# EAGLE board pcb (EAGLE 9.7.0)
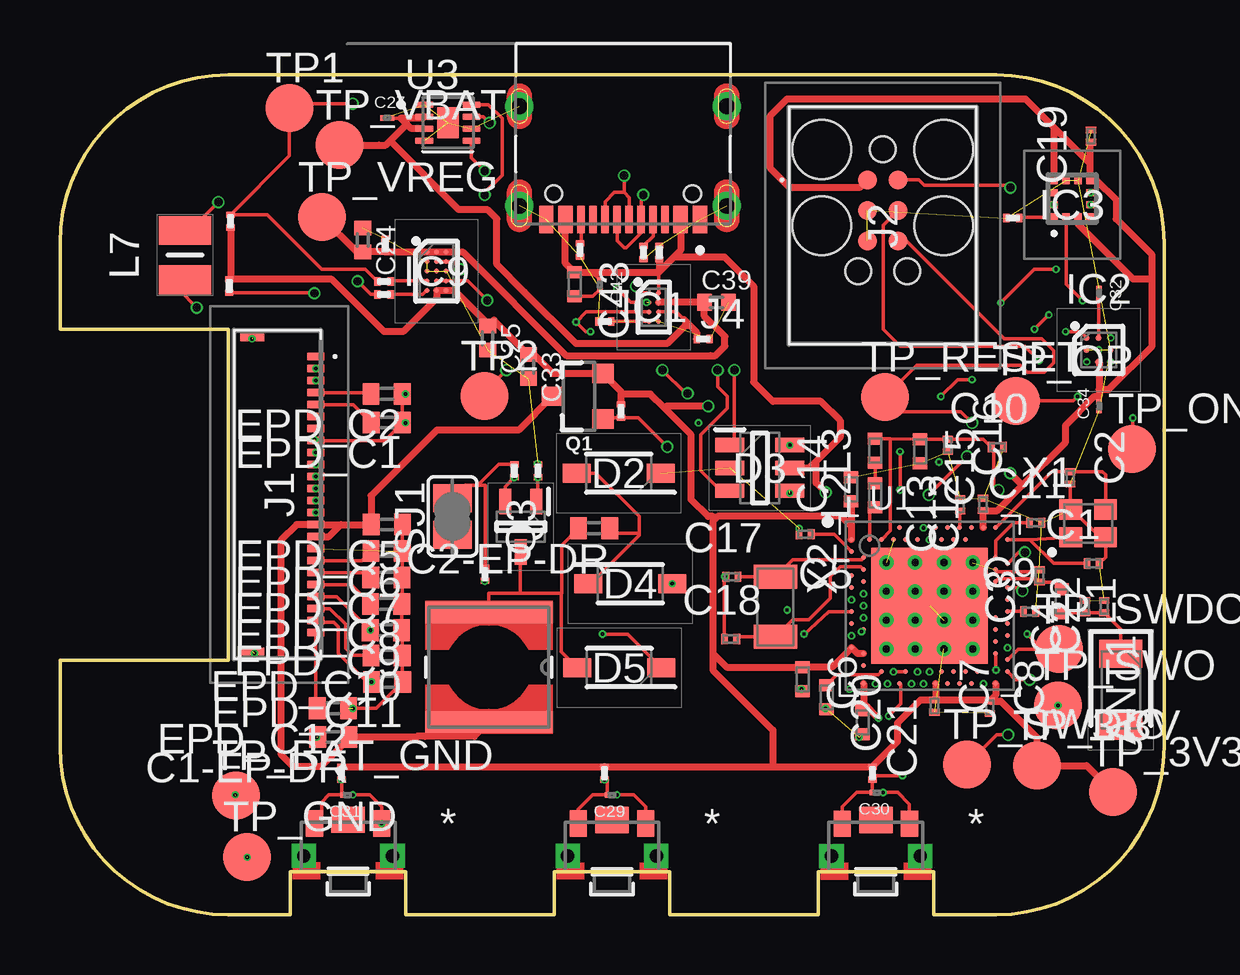
[diagram p0: board, top side]
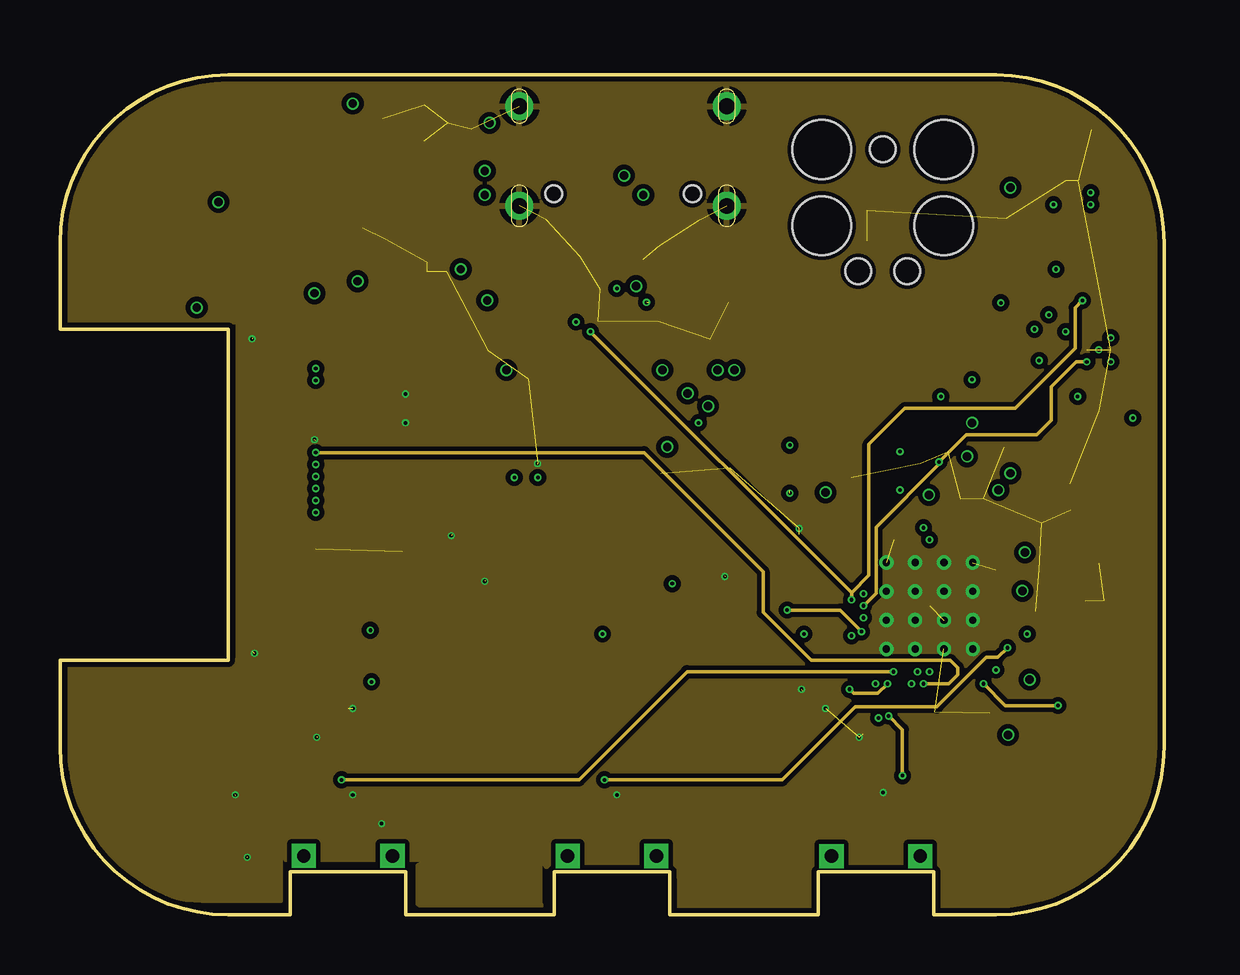
[diagram p1: board, inner layer Route2]
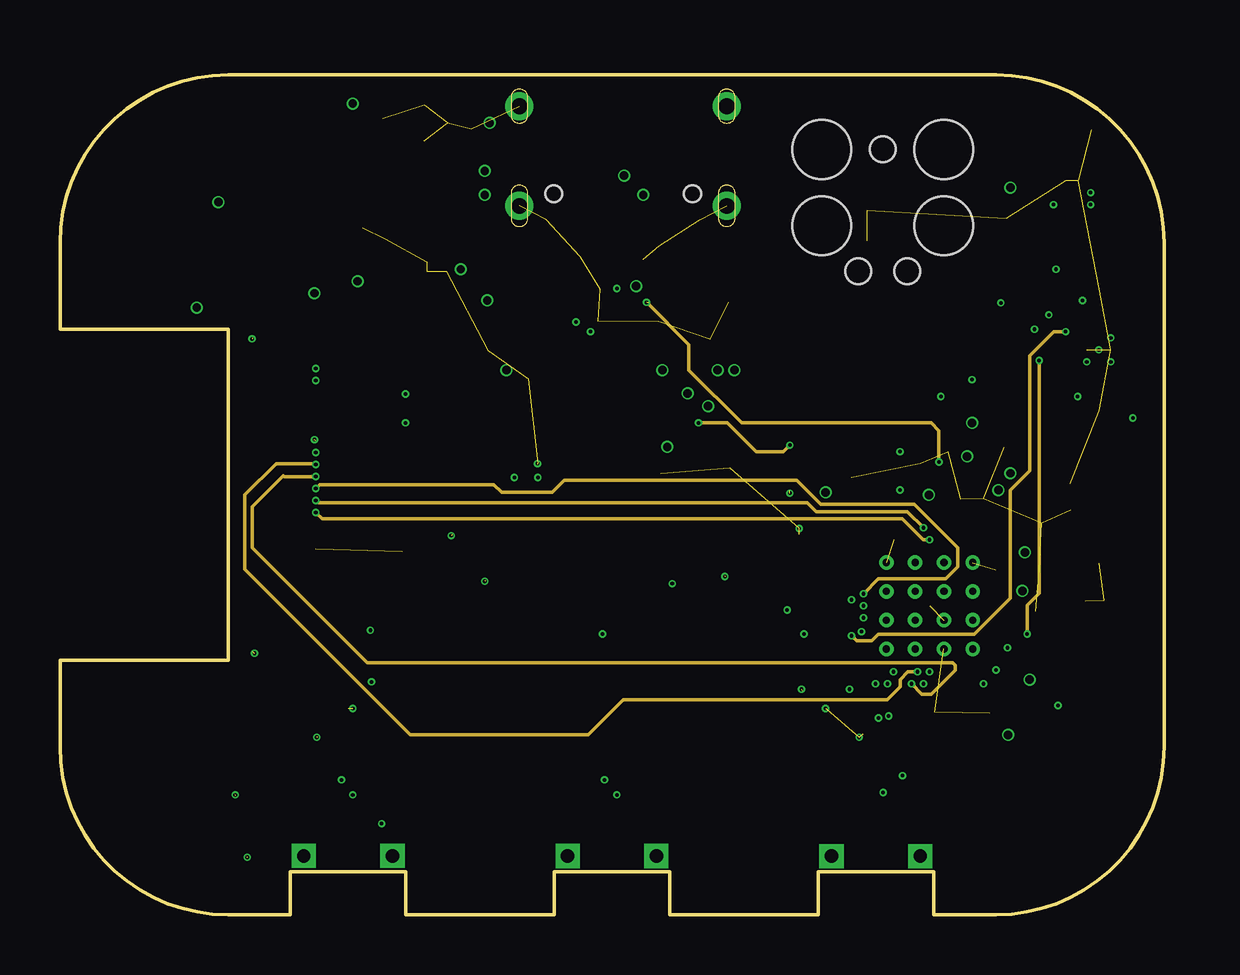
[diagram p2: board, inner layer Route15]
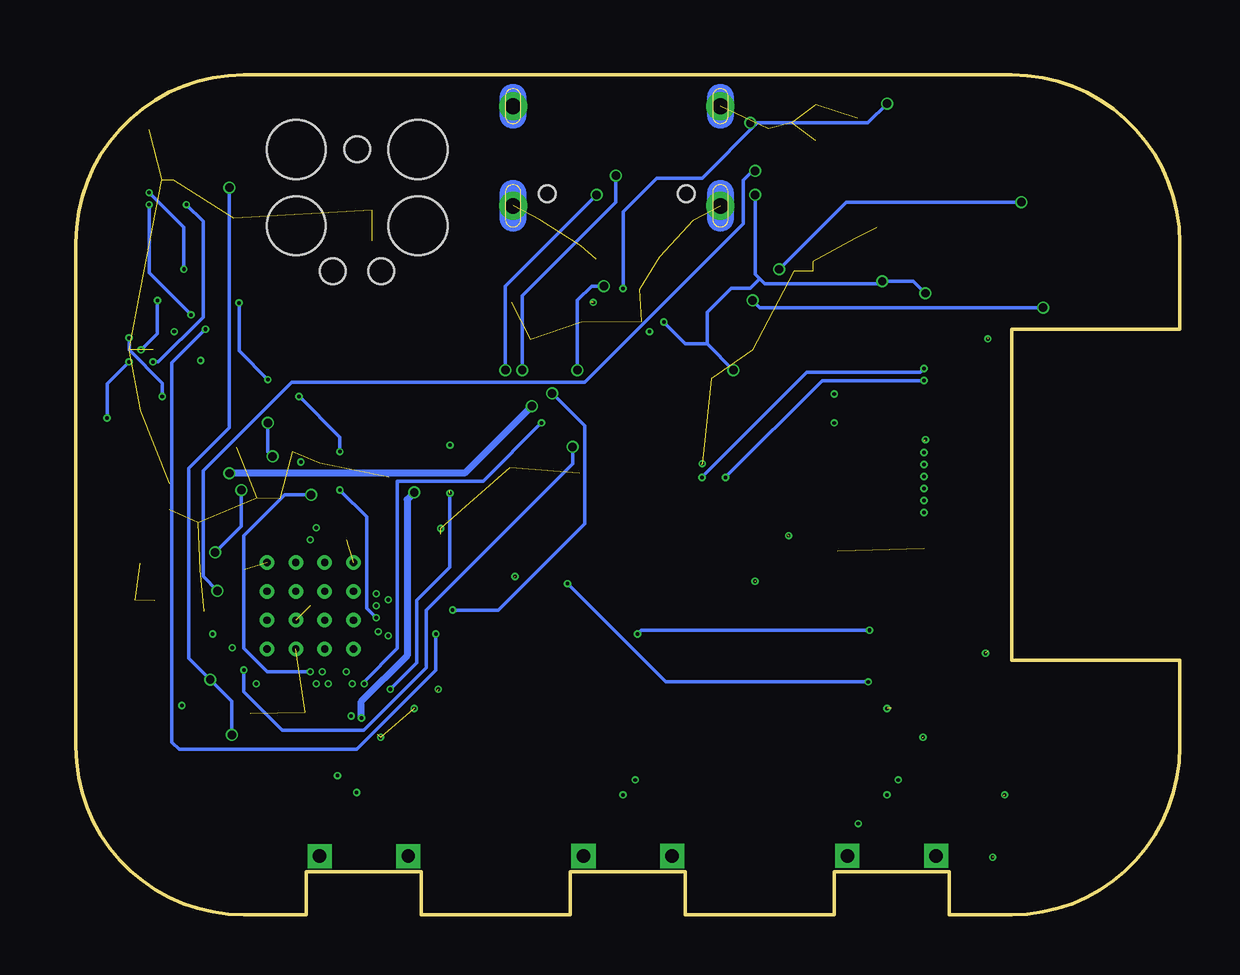
[diagram p3: board, bottom side, seen from below]

Size 46 x 35 mm. Coordinates in mm from the lower left corner, seen from the top.
Outline: 0,10.6 0,7 arc90 7,0 9.6,0 9.6,1.8 14.4,1.8 14.4,0 20.6,0 20.6,1.8 25.4,1.8 25.4,0 31.6,0 31.6,1.8 36.4,1.8 36.4,0 39,0 arc90 46,7 46,28 arc90 39,35 7,35 arc90 0,28 0,24.4 7,24.4 7,10.6 0,10.6
Copper layers (1+2*15+16): Top 0.035mm / dielectric 1.6mm / Route2 0.035mm / dielectric 0.15mm / Route15 0.035mm / dielectric 0.2mm / Bottom 0.035mm
Design rules "jlcpcb-2layers.dru *": minimum track width 0.075mm, minimum drill 0.15mm, track to track 5mil, track to pad 5mil, pad to pad 5mil, via to via 5mil, smd to smd 5mil, copper to edge 0.2mm, drill to drill 6mil, minimum pad ring 0.075mm, minimum via ring 0.075mm, stop-mask expansion 4mil, vias tented up to drill 0mil, thermal gap 10mil

## Footprints (pad centres in the part's own frame; a part is rotated, then mirrored left to right if it is on the bottom)
2450AT18B100E_ANTC3216X140N = smd 1.15 x 1.8: 1 -1.5,0; 2 1.5,0
NORDIC_NRF_3_RESC0201_L = smd 0.28 x 0.43: 1 -0.255,0; 2 0.255,0
ESP32_C6_LIBRARY_1_ESP32_WROVER_EAGLE-LTSPICE_C0402 = smd 0.7 x 0.9: 1 -0.65,0; 2 0.65,0
NORDIC_NRF_3_RESC0402_L = smd 0.5 x 0.6: 1 -0.5,0; 2 0.5,0
GRM011R60J152KE01L_1_0201 = smd 0.35 x 0.25: 1 0,0.275; 2 0,-0.275
PERFECT_0402_0402 = smd 0.6 x 0.7: 1 -0.5,0; 2 0.5,0
GRM011R60J152KE01L_2_CAPC0201X13N = smd 0.22 x 0.23: 1 -0.185,0; 2 0.185,0
ESP32_C6_LIBRARY_5_SOD3716X135N = smd 1.15 x 0.8: 1 -1.75,0; 2 1.75,0
ESP32_C6_LIBRARY_3_SOT95P280X145-6N = smd 1.2 x 0.6: 1 -1.25,0.95; 2 -1.25,0; 3 -1.25,-0.95; 4 1.25,-0.95; 5 1.25,0; 6 1.25,0.95
BQ25180YBGR_BGA8C40P2X4_100X155X50 = smd 0.2 x 0.2: A1 -0.2,0.6; A2 0.2,0.6; B1 -0.2,0.2; B2 0.2,0.2; C1 -0.2,-0.2; C2 0.2,-0.2; D1 -0.2,-0.6; D2 0.2,-0.6
DRV2605YZFR_BGA9C50P3X3_144X144X62 = smd 0.25 x 0.25: A1 -0.5,0.5; A2 0,0.5; A3 0.5,0.5; B1 -0.5,0; B2 0,0; B3 0.5,0; C1 -0.5,-0.5; C2 0,-0.5; C3 0.5,-0.5
BMA423_BMA423 = smd 0.3 x 0.35: 1 -0.75,-0.775; 2 -0.25,-0.775; 3 0.25,-0.775; 4 0.75,-0.775; 7 0.75,0.775; 8 0.25,0.775; 9 -0.25,0.775; 10 -0.75,0.775 | smd 0.35 x 0.3: 5 0.775,-0.25; 6 0.775,0.25; 11 -0.775,0.25; 12 -0.775,-0.25
RT6160AWSC_BGA15C40P3X5_140X230X60 = smd 0.216 x 0.216: A1 -0.4,0.8; A2 0,0.8; A3 0.4,0.8; B1 -0.4,0.4; B2 0,0.4; B3 0.4,0.4; C1 -0.4,0; C2 0,0; C3 0.4,0; D1 -0.4,-0.4; D2 0,-0.4; D3 0.4,-0.4; E1 -0.4,-0.8; E2 0,-0.8; E3 0.4,-0.8
503480-2400_5034802400 = smd 0.3 x 0.7: 1 -5.75,1.525; 2 -5.25,1.525; 3 -4.75,1.525; 4 -4.25,1.525; 5 -3.75,1.525; 6 -3.25,1.525; 7 -2.75,1.525; 8 -2.25,1.525; 9 -1.75,1.525; 10 -1.25,1.525; 11 -0.75,1.525; 12 -0.25,1.525; 13 0.25,1.525; 14 0.75,1.525; 15 1.25,1.525; 16 1.75,1.525; 17 2.25,1.525; 18 2.75,1.525; 19 3.25,1.525; 20 3.75,1.525; 21 4.25,1.525; 22 4.75,1.525; 23 5.25,1.525; 24 5.75,1.525 | smd 0.3 x 1: MP1 -6.54,-1.125; MP2 6.54,-1.125
TC2030-IDC_TC2030IDC = smd 0.783 x 0.783: 1 -0.953,-0.635; 2 -0.953,0.635; 3 0.317,-0.635; 4 0.317,0.635; 5 1.588,-0.635; 6 1.588,0.635 | hole 2.451: -2.223,-2.54; -2.223,2.54; 0.952,-2.54; 0.952,2.54 | hole 1.067: -2.223,0; 2.857,-1.016; 2.857,1.016
KH-TYPE-C-16P_KINGHELM_KH-TYPE-C-16P = smd 0.6 x 1.15: A1_B12 -3.2,4.725; A4_B9 -2.4,4.725; A9_B4 2.4,4.725; A12_B1 3.2,4.725 | smd 0.3 x 1.15: A5 -1.25,4.725; A6 -0.25,4.725; A7 0.25,4.725; A8 1.25,4.725; B5 1.75,4.725; B6 0.75,4.725; B7 -0.75,4.725; B8 -1.75,4.725 | drill 0.65 pad 1.05: SH1 -4.32,0; SH2 4.32,0; SH3 -4.32,4.15; SH4 4.32,4.15 | hole 0.7: -2.89,3.65; 2.89,3.65
NORDIC_NRF_2_RESC0402_L = smd 0.5 x 0.6: 1 -0.5,0; 2 0.5,0
ESP32_C6_LIBRARY_2_IND_4828-WE-TPC_WRE = smd 0.9 x 5.3: 1 -2.286,0; 2 2.286,0
MLP2016SR47MT0S1_INDC2016X100N = smd 1.2 x 2.2: 1 -1.028,0; 2 1.028,0
ESP32_C6_LIBRARY_4_ESP32_C6_LIBRARY_4_ESP32_C6_LIBRARY_4_ESP32_C6_LIBRARY_4_ESP32_WROVER_SPARKFUN-DISCRETESEMI_SOT23-3 = smd 0.8 x 0.9: 1 -0.95,-1; 2 0.95,-1; 3 0,1.1
ESP32_C6_LIBRARY_6_SOT65P210X110-3N = smd 1.05 x 0.5: 1 -1.05,0.65; 2 -1.05,-0.65; 3 1.05,0
CPF0201D7K68C1_0201 = smd 0.35 x 0.25: 1 0,0.275; 2 0,-0.275
ESP32_C6_LIBRARY_7_JUMPER_SJ = smd 1.168 x 1.6: 1 -0.762,0; 2 0.762,0
2025-10-22_07-23-44_LIBRARY_SW_EVP-AKE31A_PAN = smd 0.711 x 1.092: 1 -1.4,-0.972; 2 1.4,-0.972 | drill 0.559 pad 0.914 square: 3 -1.848,0.381; 4 1.848,0.381 | smd 1.397 x 1.092: 5 0,-1.124
HECTOR_WATCH_1_TP20R = smd 2 x 2: TP 0,0
NORDIC_NRF_4_AQFN50P700X700X85_HS-74N = smd 4.85 x 4.85: P$74 0,0 | drill 0.3 pad 0.6: P$75 -1.8,1.8; P$76 -0.6,1.8; P$77 0.6,1.8; P$78 1.8,1.8; P$79 -1.8,0.6; P$80 -0.6,0.6; P$81 0.6,0.6; P$82 1.8,0.6; P$83 -1.8,-0.6; P$84 -0.6,-0.6; P$85 0.6,-0.6; P$86 1.8,-0.6; P$87 -1.8,-1.8; P$88 -0.6,-1.8; P$89 0.6,-1.8; P$90 1.8,-1.8 | smd 0.2 x 0.2: P$A8 -1.25,3.25; P$A10 -0.75,3.25; P$A12 -0.25,3.25; P$A14 0.25,3.25; P$A16 0.75,3.25; P$A18 1.25,3.25; P$A20 1.75,3.25; P$A22 2.25,3.25; P$A23 2.75,3.25; P$AA24 3.25,-2.25; P$AB2 -2.75,-2.5; P$AC5 -2,-2.75; P$AC9 -1,-2.75; P$AC11 -0.5,-2.75; P$AC13 0,-2.75; P$AC15 0.5,-2.75; P$AC17 1,-2.75; P$AC19 1.5,-2.75; P$AC21 2,-2.75; P$AC24 3.25,-2.75; P$AD2 -2.75,-3.25; P$AD4 -2.25,-3.25; P$AD6 -1.75,-3.25; P$AD8 -1.25,-3.25; P$AD10 -0.75,-3.25; P$AD12 -0.25,-3.25; P$AD14 0.25,-3.25; P$AD16 0.75,-3.25; P$AD18 1.25,-3.25; P$AD20 1.75,-3.25; P$AD22 2.25,-3.25; P$AD23 2.75,-3.25; P$B1 -3.25,2.75; P$B3 -2.5,2.75; P$B5 -2,2.75; P$B7 -1.5,2.75; P$B9 -1,2.75; P$B11 -0.5,2.75; P$B13 0,2.75; P$B15 0.5,2.75; P$B17 1,2.75; P$B19 1.5,2.75; P$B24 3.25,2.75; P$C1 -3.25,2.25; P$D2 -2.75,2; P$D23 2.75,2; P$E24 3.25,1.75; P$F2 -2.75,1.5; P$F23 2.75,1.5; P$G1 -3.25,1.25; P$H2 -2.75,1; P$H23 2.75,1; P$J1 -3.25,0.75; P$J24 3.25,0.75; P$K2 -2.75,0.5; P$L1 -3.25,0.25; P$L24 3.25,0.25; P$M2 -2.75,0; P$N1 -3.25,-0.25; P$N24 3.25,-0.25; P$P2 -2.75,-0.5; P$P23 2.75,-0.5; P$R1 -3.25,-0.75; P$R24 3.25,-0.75; P$T2 -2.75,-1; P$T23 2.75,-1; P$U1 -3.25,-1.25; P$U24 3.25,-1.25; P$V23 2.75,-1.5; P$W1 -3.25,-1.75; P$W24 3.25,-1.75; P$Y2 -2.75,-2; P$Y23 2.75,-2
ESP32_C6_LIBRARY_SON50P200X200X80-9N = smd 0.76 x 0.27: 1 -0.985,0.75; 2 -0.985,0.25; 3 -0.985,-0.25; 4 -0.985,-0.75; 5 0.985,-0.75; 6 0.985,-0.25; 7 0.985,0.25; 8 0.985,0.75 | smd 0.9 x 1.3: 9 0,0
NORDIC_NRF_BT-XTAL_2016_N = smd 0.95 x 0.85: 1 -0.725,-0.575; 2 0.725,-0.575; 3 0.725,0.575; 4 -0.725,0.575
NORDIC_NRF_1_XTAL_3215_N = smd 1 x 1.8: 1 -1.25,0; 2 1.25,0

## Placement (x,y rotation side)
ANT1  2450AT18B100E  [2450AT18B100E_ANTC3216X140N]  44.2,9.38 270 top
C1  12pF  [NORDIC_NRF_3_RESC0201_L]  43.05,14.64 0 top
C1-EP-DR  10uF  [ESP32_C6_LIBRARY_1_ESP32_WROVER_EAGLE-LTSPICE_C0402]  11.39,7.41 180 top
C2  12pF  [NORDIC_NRF_3_RESC0201_L]  42.09,18.21 270 top
C2-EP-DR  4.7uF  [ESP32_C6_LIBRARY_1_ESP32_WROVER_EAGLE-LTSPICE_C0402]  22.25,16.11 180 top
C3  1pF  [NORDIC_NRF_3_RESC0201_L]  40.81,14.12 90 top
C4  1pF  [NORDIC_NRF_3_RESC0201_L]  42.71,12.84 90 top
C5  100nF  [NORDIC_NRF_3_RESC0201_L]  31.05,15.86 180 top
C6  4.7μF  [NORDIC_NRF_3_RESC0402_L]  30.94,9.82 270 top
C7  100nF  [NORDIC_NRF_3_RESC0201_L]  36.44,8.7 270 top
C8  100nF  [NORDIC_NRF_3_RESC0201_L]  38.74,8.65 270 top
C9  820pF  [NORDIC_NRF_3_RESC0201_L]  40.4,12.64 0 top
C10  N.C.  [NORDIC_NRF_3_RESC0201_L]  39.06,19.49 0 top
C11  100pF  [NORDIC_NRF_3_RESC0201_L]  40.65,16.34 0 top
C12  100nF  [NORDIC_NRF_3_RESC0201_L]  38.46,17.1 90 top
C13  N.C.  [NORDIC_NRF_3_RESC0201_L]  37.51,17.08 90 top
C14  4.7μF  [NORDIC_NRF_3_RESC0402_L]  32.96,17.73 90 top
C15  1.0μF  [NORDIC_NRF_3_RESC0402_L]  35.84,19.32 270 top
C16  47nF  [NORDIC_NRF_3_RESC0201_L]  36.99,19.56 270 top
C17  12pF  [NORDIC_NRF_3_RESC0201_L]  27.99,14.09 0 top
C18  12pF  [NORDIC_NRF_3_RESC0201_L]  27.94,11.49 0 top
C19  100nF  [NORDIC_NRF_3_RESC0201_L]  42.96,32.45 90 top
C20  4.7μF  [NORDIC_NRF_3_RESC0402_L]  31.94,9.07 270 top
C21  4.7μF  [NORDIC_NRF_3_RESC0402_L]  33.44,8.02 270 top
C22  N.C.  [NORDIC_NRF_3_RESC0201_L]  43.51,12.84 90 top
C23  0.1uF  [GRM011R60J152KE01L_1_0201]  13.55,27.9 0 top
C24  10uF  [PERFECT_0402_0402]  12.62,28.12 270 top
C25  22uF  [PERFECT_0402_0402]  17.82,24.03 270 top
C27  0.1uF  [GRM011R60J152KE01L_2_CAPC0201X13N]  13.63,33.2 0 top
C29  1uF  [GRM011R60J152KE01L_2_CAPC0201X13N]  22.99,5 180 top
C30  1uF  [GRM011R60J152KE01L_2_CAPC0201X13N]  34.03,5.1 180 top
C31  1uF  [GRM011R60J152KE01L_2_CAPC0201X13N]  11.97,5 180 top
C32  1uF  [GRM011R60J152KE01L_2_CAPC0201X13N]  43.3,25.91 270 top
C33  22uF  [PERFECT_0402_0402]  19.52,22.84 270 top
C34  0.1uF  [GRM011R60J152KE01L_2_CAPC0201X13N]  43.3,21.19 90 top
C37  1uF  [GRM011R60J152KE01L_1_0201]  26.8,23.99 270 top
C38  1uF  [GRM011R60J152KE01L_1_0201]  24.97,27.6 0 top
C39  10uF  [PERFECT_0402_0402]  27.35,25.52 0 top
C42  0.1uF  [GRM011R60J152KE01L_2_CAPC0201X13N]  22.5,26.25 270 top
C43  4.7uF  [NORDIC_NRF_3_RESC0402_L]  21.44,26.27 270 top
D2  MBR0530  [ESP32_C6_LIBRARY_5_SOD3716X135N]  23.28,18.4 180 top
D3  USBLC6-2SC6Y  [ESP32_C6_LIBRARY_3_SOT95P280X145-6N]  29.16,18.62 0 top
D4  MBR0530  [ESP32_C6_LIBRARY_5_SOD3716X135N]  23.76,13.8 0 top
D5  MBR0530  [ESP32_C6_LIBRARY_5_SOD3716X135N]  23.3,10.3 180 top
EPD_C1  1uF  [ESP32_C6_LIBRARY_1_ESP32_WROVER_EAGLE-LTSPICE_C0402]  13.62,20.51 180 top
EPD_C2  1uF  [ESP32_C6_LIBRARY_1_ESP32_WROVER_EAGLE-LTSPICE_C0402]  13.61,21.71 180 top
EPD_C5  0.1uF  [ESP32_C6_LIBRARY_1_ESP32_WROVER_EAGLE-LTSPICE_C0402]  13.62,16.26 180 top
EPD_C6  1uF  [ESP32_C6_LIBRARY_1_ESP32_WROVER_EAGLE-LTSPICE_C0402]  13.61,15.16 180 top
EPD_C7  1uF  [ESP32_C6_LIBRARY_1_ESP32_WROVER_EAGLE-LTSPICE_C0402]  13.6,14.06 180 top
EPD_C8  1uF  [ESP32_C6_LIBRARY_1_ESP32_WROVER_EAGLE-LTSPICE_C0402]  13.59,12.96 180 top
EPD_C9  1uF  [ESP32_C6_LIBRARY_1_ESP32_WROVER_EAGLE-LTSPICE_C0402]  13.58,11.86 180 top
EPD_C10  1uF  [ESP32_C6_LIBRARY_1_ESP32_WROVER_EAGLE-LTSPICE_C0402]  13.61,10.81 180 top
EPD_C11  1uF  [ESP32_C6_LIBRARY_1_ESP32_WROVER_EAGLE-LTSPICE_C0402]  13.63,9.71 180 top
EPD_C12  1uF  [ESP32_C6_LIBRARY_1_ESP32_WROVER_EAGLE-LTSPICE_C0402]  11.37,8.61 180 top
IC1  BQ25180YBGR  [BQ25180YBGR_BGA8C40P2X4_100X155X50]  24.74,25.32 0 top
IC2  DRV2605YZFR  [DRV2605YZFR_BGA9C50P3X3_144X144X62]  43.28,23.54 0 top
IC3  BMA421  [BMA423_BMA423]  42.17,29.84 0 top
IC9  RT6160AWSC  [RT6160AWSC_BGA15C40P3X5_140X230X60]  15.69,26.82 0 top
J1  503480-2400  [503480-2400_5034802400]  9.13,17.51 270 top
J2  TC2030-IDC  [TC2030-IDC_TC2030IDC]  34.28,29.67 270 top
J4  KH-TYPE-C-16P  [KH-TYPE-C-16P_KINGHELM_KH-TYPE-C-16P]  23.46,33.69 180 top
L1  3.9nH  [NORDIC_NRF_2_RESC0402_L]  41.74,13.07 270 top
L2  10μH  [NORDIC_NRF_2_RESC0402_L]  33.96,17.48 90 top
L3  15nH  [NORDIC_NRF_2_RESC0402_L]  33.96,19.33 90 top
L5  68uH  [ESP32_C6_LIBRARY_2_IND_4828-WE-TPC_WRE]  17.87,10.32 270 top
L7  FTC252012SR47MBCA  [MLP2016SR47MT0S1_INDC2016X100N]  5.21,27.49 270 top
Q1  20V/4.2A/52mΩ/1.4W  [ESP32_C6_LIBRARY_4_ESP32_C6_LIBRARY_4_ESP32_C6_LIBRARY_4_ESP32_C6_LIBRARY_4_ESP32_WROVER_SPARKFUN-DISCRETESEMI_SOT23-3]  21.62,21.61 90 top
Q3  SI1308EDL-T1-GE3  [ESP32_C6_LIBRARY_6_SOT65P210X110-3N]  19.2,16.17 270 top
R1_EP_DR  0.47  [CPF0201D7K68C1_0201]  18.93,18.5 0 top
R1_USB  5K1  [CPF0201D7K68C1_0201]  24.31,27.6 180 top
R2  0  [CPF0201D7K68C1_0201]  13.5,25.85 90 top
R2_EP_DR  10K  [CPF0201D7K68C1_0201]  19.91,18.5 0 top
R2_USB  5K1  [CPF0201D7K68C1_0201]  21.67,27.7 0 top
R3  0  [CPF0201D7K68C1_0201]  39.7,29.03 90 top
R4  0  [CPF0201D7K68C1_0201]  13.5,26.39 90 top
R5  10k  [CPF0201D7K68C1_0201]  33.85,5.9 180 top
R7  10k  [CPF0201D7K68C1_0201]  22.69,5.9 180 top
R8  10k  [CPF0201D7K68C1_0201]  11.73,5.9 180 top
R9  10K  [CPF0201D7K68C1_0201]  22.7,24.73 90 top
R17  3K3  [CPF0201D7K68C1_0201]  7.11,28.9 180 top
R18  3K3  [CPF0201D7K68C1_0201]  7.05,26.2 0 top
R_PWR_EPD  10K  [CPF0201D7K68C1_0201]  23.37,20.99 180 top
R_TYPE_SEL  2.2  [CPF0201D7K68C1_0201]  17.71,14.19 180 top
SJ1  [ESP32_C6_LIBRARY_7_JUMPER_SJ]  16.35,16.6 90 top
SW_DN  2025-10-22_07-23-44_LIBRARY_EVP-AKE31ASW_EVP-AKE31A_PAN  [2025-10-22_07-23-44_LIBRARY_SW_EVP-AKE31A_PAN]  23,2.83 180 top
SW_ENT  2025-10-22_07-23-44_LIBRARY_EVP-AKE31ASW_EVP-AKE31A_PAN  [2025-10-22_07-23-44_LIBRARY_SW_EVP-AKE31A_PAN]  12,2.84 180 top
SW_UP  2025-10-22_07-23-44_LIBRARY_EVP-AKE31ASW_EVP-AKE31A_PAN  [2025-10-22_07-23-44_LIBRARY_SW_EVP-AKE31A_PAN]  34,2.83 180 top
TP1  HECTOR_WATCH_1_TPTP20R  [HECTOR_WATCH_1_TP20R]  9.56,33.62 0 top
TP2  HECTOR_WATCH_1_TPTP20R  [HECTOR_WATCH_1_TP20R]  17.68,21.62 0 top
TP_3.3V  HECTOR_WATCH_1_TPTP20R  [HECTOR_WATCH_1_TP20R]  40.7,6.22 0 top
TP_3V3  HECTOR_WATCH_1_TPTP20R  [HECTOR_WATCH_1_TP20R]  43.88,5.12 0 top
TP_BAT_GND  HECTOR_WATCH_1_TPTP20R  [HECTOR_WATCH_1_TP20R]  7.33,4.97 0 top
TP_GND  HECTOR_WATCH_1_TPTP20R  [HECTOR_WATCH_1_TP20R]  7.79,2.42 0 top
TP_ON  HECTOR_WATCH_1_TPTP20R  [HECTOR_WATCH_1_TP20R]  44.66,19.42 0 top
TP_OP  HECTOR_WATCH_1_TPTP20R  [HECTOR_WATCH_1_TP20R]  39.84,21.42 0 top
TP_RESET  HECTOR_WATCH_1_TPTP20R  [HECTOR_WATCH_1_TP20R]  34.37,21.57 0 top
TP_SWDCLK  HECTOR_WATCH_1_TPTP20R  [HECTOR_WATCH_1_TP20R]  41.63,11.07 0 top
TP_SWDIO  HECTOR_WATCH_1_TPTP20R  [HECTOR_WATCH_1_TP20R]  37.8,6.27 0 top
TP_SWO  HECTOR_WATCH_1_TPTP20R  [HECTOR_WATCH_1_TP20R]  41.58,8.72 0 top
TP_VBAT  HECTOR_WATCH_1_TPTP20R  [HECTOR_WATCH_1_TP20R]  11.65,32.07 0 top
TP_VREG  HECTOR_WATCH_1_TPTP20R  [HECTOR_WATCH_1_TP20R]  10.91,29.07 0 top
U1  NRF52840_QF  [NORDIC_NRF_4_AQFN50P700X700X85_HS-74N]  36.23,12.88 0 top
U3  MAX17048G+T10  [ESP32_C6_LIBRARY_SON50P200X200X80-9N]  16.16,33.01 0 top
X1  32MHz  [NORDIC_NRF_BT-XTAL_2016_N]  42.84,16.31 0 top
X2  32.768kHz  [NORDIC_NRF_1_XTAL_3215_N]  29.81,12.83 270 top

## Library data of the parts
ANT1 = InkTime_v5; ARROW_PART_NUMBER: 2450AT18B100E; ARROW_PRICE-STOCK: https://www.arrow.com/en/products/2450at18b100e/johanson-dielectrics?utm_currency=USD&region=nac; DESCRIPTION: Antennas 2.45GHz ANTENNA; HEIGHT: 1.4mm; MANUFACTURER_NAME: JOHANSON TECHNOLOGY; MANUFACTURER_PART_NUMBER: 2450AT18B100E; MOUSER_PART_NUMBER: 609-2450AT18B100E; MOUSER_PRICE-STOCK: https://www.mouser.co.uk/ProductDetail/Johanson-Technology/2450AT18B100E?qs=yCnrNFeXz%252Bh5MFsFIXGZGA%3D%3D
C1-C25 C33 C37-C39 C43 L1-L3 R1_EP_DR R1_USB R2 R2_EP_DR R2_USB R3-R5 R7-R9 R17 R18 R_PWR_EPD R_TYPE_SEL SJ1 TP1 TP2 TP_3.3V TP_3V3 TP_BAT_GND TP_GND TP_ON TP_OP TP_RESET TP_SWDCLK TP_SWDIO TP_SWO TP_VBAT TP_VREG U1 X1 X2 = InkTime_v5
C1-EP-DR C2-EP-DR EPD_C1 EPD_C2 EPD_C5-EPD_C12 = InkTime_v5; SPICEMODEL: NONE; SPICEPREFIX: C
C27 C29-C32 C34 C42 = InkTime_v5; AVAILABILITY: In Stock; CHECK_PRICES: https://www.snapeda.com/parts/GRM011R60J152KE01L/Murata/view-part/?ref=eda; DESCRIPTION: SMD Capacitor X5R(EIA) with Capacitance: 1500pF Tol. 10%. Rated Voltage: 6.3Vdc; MF: Murata; MP: GRM011R60J152KE01L; PACKAGE: 0201 Murata; PRICE: None; SNAPEDA_LINK: https://www.snapeda.com/parts/GRM011R60J152KE01L/Murata/view-part/?ref=snap
D2 D4 D5 = InkTime_v5; AVAILABILITY: In Stock; CHECK_PRICES: https://www.snapeda.com/parts/MBR0530/Onsemi/view-part/?ref=eda; DESCRIPTION: Diode Schottky 30 V 500mA Surface Mount SOD-123; MF: ON Semiconductor; MP: MBR0530; PACKAGE: SOD-123-2 ON Semiconductor; PRICE: None; PURCHASE-URL: https://www.snapeda.com/api/url_track_click_mouser/?unipart_id=179458&manufacturer=ON Semiconductor&part_name=MBR0530&search_term=None; SNAPEDA_LINK: https://www.snapeda.com/parts/MBR0530/Onsemi/view-part/?ref=snap
D3 = InkTime_v5; AVAILABILITY: In Stock; CHECK_PRICES: https://www.snapeda.com/parts/USBLC6-2SC6Y/STMicroelectronics/view-part/?ref=eda; DESCRIPTION: 17V Clamp 5A (8/20µs) Ipp Tvs Diode Surface Mount SOT-23-6; MF: STMicroelectronics; MP: USBLC6-2SC6Y; PACKAGE: SOT-23-6 STMicroelectronics; PRICE: None; SNAPEDA_LINK: https://www.snapeda.com/parts/USBLC6-2SC6Y/STMicroelectronics/view-part/?ref=snap
IC1 = InkTime_v5; ARROW_PART_NUMBER: BQ25180YBGR; ARROW_PRICE-STOCK: https://www.arrow.com/en/products/bq25180ybgr/texas-instruments?utm_currency=USD&region=nac; DESCRIPTION: Charger IC Lithium Ion/Polymer, Lithium Iron Phosphate 8-DSBGA (1.6x1.1); HEIGHT: 0.5mm; MANUFACTURER_NAME: Texas Instruments; MANUFACTURER_PART_NUMBER: BQ25180YBGR; MOUSER_PART_NUMBER: 595-BQ25180YBGR; MOUSER_PRICE-STOCK: https://www.mouser.co.uk/ProductDetail/Texas-Instruments/BQ25180YBGR?qs=doiCPypUmgEWjAK%252BJAX6Tw%3D%3D
IC2 = InkTime_v5; ARROW_PART_NUMBER: DRV2605YZFR; ARROW_PRICE-STOCK: https://www.arrow.com/en/products/drv2605yzfr/texas-instruments?region=nac; DESCRIPTION: Haptic Driver for ERM/LRA with Built-In Library and Smart Loop Architecture; HEIGHT: 0.625mm; MANUFACTURER_NAME: Texas Instruments; MANUFACTURER_PART_NUMBER: DRV2605YZFR
IC3 = InkTime_v5; ARROW_PART_NUMBER: BMA423; ARROW_PRICE-STOCK: https://www.arrow.com/en/products/bma423/bosch; DESCRIPTION: Accelerometers Triaxial low-g 12bit Acceleration Sensor; HEIGHT: 1mm; MANUFACTURER_NAME: BOSCH; MANUFACTURER_PART_NUMBER: BMA423; MOUSER_PART_NUMBER: 262-BMA423; MOUSER_PRICE-STOCK: https://www.mouser.co.uk/ProductDetail/Bosch-Sensortec/BMA423?qs=HXFqYaX1Q2xC%252BSgeGoX3mg%3D%3D
IC9 = InkTime_v5; DESCRIPTION: Buck-Boost Regulator Positive Output Step-Up/Step-Down I2C DC-DC Controller IC 15-WL-CSP (BSC) (1.4x2.3); HEIGHT: 0.6mm; MANUFACTURER_NAME: RICHTEK; MANUFACTURER_PART_NUMBER: RT6160AWSC; MOUSER_PART_NUMBER: 835-RT6160AWSC; MOUSER_PRICE-STOCK: https://www.mouser.co.uk/ProductDetail/Richtek/RT6160AWSC?qs=amGC7iS6iy%2FLd9PSoixZXQ%3D%3D
J1 = InkTime_v5; DESCRIPTION: FFC & FPC Connectors 0.5mm FPC RA SMT Dual Contact 24Ckt; HEIGHT: 1.87mm; MANUFACTURER_NAME: Molex; MANUFACTURER_PART_NUMBER: 503480-2400; MOUSER_PART_NUMBER: 538-503480-2400; MOUSER_PRICE-STOCK: https://www.mouser.co.uk/ProductDetail/Molex/503480-2400?qs=OAhjpuo3Vu7efIoxFh9AOw%3D%3D
J2 = InkTime_v5; DESCRIPTION: CABLE ADAPTER 6 POS; HEIGHT: 19mm; MANUFACTURER_NAME: Tag Connect; MANUFACTURER_PART_NUMBER: TC2030-IDC
J4 = InkTime_v5; AVAILABILITY: Not in stock; CHECK_PRICES: https://www.snapeda.com/parts/KH-TYPE-C-16P/Kinghelm/view-part/?ref=eda; MF: kinghelm; MP: KH-TYPE-C-16P; PACKAGE: None; PRICE: None; SNAPEDA_LINK: https://www.snapeda.com/parts/KH-TYPE-C-16P/Kinghelm/view-part/?ref=snap
L5 = InkTime_v5; COPYRIGHT: Copyright (C) 2024 Ultra Librarian. All rights reserved.; MANUFACTURER_PART_NUMBER: 744043680; MFR_NAME: Wurth Electronics
L7 = InkTime_v5; DESCRIPTION: SMD / SMT Inductors (Coils), L=0.47?H, L x W x T :; HEIGHT: 1mm; JLCPCB: https://jlcpcb.com/partdetail/6763488-FTC252012SR47MBCA/C5832368; MANUFACTURER_NAME: TDK; MANUFACTURER_PART_NUMBER: FTC252012SR47MBCA
Q1 = InkTime_v5; PROD_ID: TRAN-14388; SPECIFICATII: DMG2305UX-7
Q3 = InkTime_v5; AVAILABILITY: In Stock; CHECK_PRICES: https://www.snapeda.com/parts/SI1308EDL-T1-GE3/Vishay+Siliconix/view-part/?ref=eda; DESCRIPTION: Si1308EDL-T1-GE3 N-channel MOSFET Transistor, 1.5 A, 30 V, 3-Pin SC-70 | Siliconix / Vishay SI1308EDL-T1-GE3; MF: Vishay Siliconix; MP: SI1308EDL-T1-GE3; PACKAGE: SOT-323 Vishay Semiconductor; PRICE: None; PURCHASE-URL: https://www.snapeda.com/api/url_track_click_mouser/?unipart_id=274603&manufacturer=Vishay Siliconix&part_name=SI1308EDL-T1-GE3&search_term=None; SNAPEDA_LINK: https://www.snapeda.com/parts/SI1308EDL-T1-GE3/Vishay+Siliconix/view-part/?ref=snap
SW_DN SW_ENT SW_UP = InkTime_v5; COPYRIGHT: Copyright (C) 2025 Ultra Librarian. All rights reserved.; DIGI-KEY_PART_NUMBER_1: P123437TR-ND; DIGI-KEY_PART_NUMBER_2: P123437CT-ND; DIGI-KEY_PART_NUMBER_3: P123437DKR-ND; MANUFACTURER_NAME: Panasonic; MANUFACTURER_PART_NUMBER: EVP-AKE31A
U3 = InkTime_v5; AVAILABILITY: In Stock; CHECK_PRICES: https://www.snapeda.com/parts/MAX17048G+T10/Analog+Devices/view-part/?ref=eda; DESCRIPTION: 3µA 1-Cell/2-Cell Fuel Gauge with ModelGauge; MF: Analog Devices; MP: MAX17048G+T10; PACKAGE: TDFN-8 Maxim; PRICE: None; PURCHASE-URL: https://www.snapeda.com/api/url_track_click_mouser/?unipart_id=329239&manufacturer=Analog Devices&part_name=MAX17048G+T10&search_term=None; SNAPEDA_LINK: https://www.snapeda.com/parts/MAX17048G+T10/Analog+Devices/view-part/?ref=snap

## Nets
3V3: C6.1 C7.1 C8.1 C12.1 C14.1 C19.1 C25.1 C33.1 C34.2 IC2.C2 IC3.3 IC3.7 IC3.10 IC9.E2 IC9.E3 J2.1 Q1.2 R5.2 R7.2 R8.2 R17.1 R18.1 R_PWR_EPD.2 TP_3.3V.TP TP_3V3.TP U1.P$A22 U1.P$AD14 U1.P$AD23 U1.P$B1 U1.P$W1 U1.P$Y2
ALERT: U1.P$J24 U3.5
D+: D3.4 U1.P$AD6
D-: D3.6 U1.P$AD4
DEC1: C5.1 U1.P$C1
DEC3: C11.1 U1.P$D23
DEC4_6: C10.1 C15.1 C16.1 L3.2 U1.P$B5 U1.P$E24
DN: D3.1 J4.A7 J4.B7
DP: D3.3 J4.A6 J4.B6
EPD_3V3: C1-EP-DR.1 EPD_C5.2 J1.15 J1.16 L5.2 Q1.3
EPD_BUSY: J1.9 U1.P$AD12
EPD_CS: J1.12 U1.P$K2
EPD_DC: J1.11 U1.P$AD10
EPD_RST: J1.10 U1.P$AC11
GDR: J1.2 Q3.1 R2_EP_DR.2
GND: C1-EP-DR.2 C1.2 C2.2 C3.2 C4.2 C5.2 C6.2 C7.2 C8.2 C9.2 C10.2 C11.2 C12.2 C13.2 C14.2 C15.2 C16.2 C17.1 C18.1 C19.2 C20.2 C21.2 C22.2 C23.1 C24.1 C25.2 C27.1 C29.1 C30.1 C31.1 C32.1 C33.2 C34.1 C37.1 C38.1 C39.2 C42.2 C43.2 D2.1 D3.2 EPD_C1.1 EPD_C2.1 EPD_C5.1 EPD_C6.1 EPD_C7.1 EPD_C8.1 EPD_C9.1 EPD_C10.1 EPD_C11.1 EPD_C12.1 IC1.D2 IC2.B1 IC2.B3 IC3.8 IC3.9 IC9.B1 IC9.C1 IC9.C2 IC9.C3 J1.8 J1.17 J1.MP1 J1.MP2 J2.3 J2.5 J4.A1_B12 J4.A12_B1 J4.SH1 J4.SH2 J4.SH3 J4.SH4 R1_USB.1 R2_EP_DR.1 R2_USB.2 R3.1 R9.1 R_TYPE_SEL.1 SJ1.1 SW_DN.1 SW_ENT.1 SW_UP.1 TP_BAT_GND.TP TP_GND.TP U1.P$74 U1.P$75 U1.P$76 U1.P$77 U1.P$78 U1.P$79 U1.P$80 U1.P$81 U1.P$82 U1.P$83 U1.P$84 U1.P$85 U1.P$86 U1.P$87 U1.P$88 U1.P$89 U1.P$90 U1.P$B7 U1.P$F23 U3.1 U3.4 U3.6 U3.9 X1.2 X1.4
HAPTIC_EN: IC2.A1 U1.P$U1
IMU_INT1: IC3.5 U1.P$N1
IMU_INT2: IC3.6 U1.P$P2
LX1: IC9.B2 IC9.B3 L7.1
LX2: IC9.D2 IC9.D3 L7.2
MOSI: J1.14 U1.P$B13
N$1: IC1.D1 R9.2
N$2: IC9.D1 R4.2
N$3: IC9.E1 R2.2
N$4: IC3.1 R3.2
N$5: L2.1 U1.P$B3
N$6: L2.2 L3.1
N$7: C2.1 U1.P$A23 X1.3
N$8: C13.1 U1.P$A18
N$9: C1.1 U1.P$B24 X1.1
N$10: C3.1 L1.1 U1.P$H23
N$11: ANT1.1 C4.1 C22.1 L1.2
N$12: C9.1 U1.P$N24
N$13: C20.1 U1.P$AC5
N$14: C2-EP-DR.2 D5.2 L5.1 Q3.3
N$15: C2-EP-DR.1 D2.2 D4.1
N$16: R1_EP_DR.1 R_TYPE_SEL.2 SJ1.2
N$17: EPD_C2.2 J1.4
N$18: EPD_C12.2 J1.24
N$19: C32.2 IC2.A2
N$20: EPD_C10.2 J1.22
N$22: EPD_C8.2 J1.20
N$23: EPD_C7.2 J1.19
N$24: EPD_C6.2 J1.18
N$26: EPD_C1.2 J1.5
N$29: J4.A5 R1_USB.2
N$30: J4.B5 R2_USB.1
OUT+: IC2.A3 TP_OP.TP
OUT-: IC2.C3 TP_ON.TP
P0.00/XL1: C17.2 U1.P$D2 X2.1
P0.01/XL2: C18.2 U1.P$F2 X2.2
P0.04: U1.P$J1
P0.09: U1.P$L24
P0.13: C30.2 R5.1 SW_UP.2 U1.P$AD8
P0.14: C31.2 R8.1 SW_ENT.2 U1.P$AC9
P0.19: U1.P$AC15
P0.20: U1.P$AD16
P0.21: U1.P$AC17
P0.22: U1.P$AD18
P0.23: U1.P$AC19
P0.24: U1.P$AD20
P0.25: U1.P$AC21
P0.26: U1.P$G1
P0.27: U1.P$H2
P0.28: U1.P$B11
P0.29: U1.P$A10
P0.30: U1.P$B9
P0.31: U1.P$A8
P1.01: Q1.1 R_PWR_EPD.1 U1.P$Y23
P1.02: C29.2 R7.1 SW_DN.2 U1.P$W24
P1.03: U1.P$V23
P1.04: U1.P$U24
P1.05: U1.P$T23
P1.06: U1.P$R24
P1.07: U1.P$P23
P1.09: U1.P$R1
P1.10: U1.P$A20
P1.11: U1.P$B19
P1.12: U1.P$B17
P1.13: U1.P$A16
P1.14: U1.P$B15
P1.15: U1.P$A14
PMIC_INT: IC1.A1 U1.P$T2
PREVGH: D5.1 EPD_C9.2 J1.21
PREVGL: D4.2 EPD_C11.2 J1.23
RESE: J1.3 Q3.2 R1_EP_DR.2
RESET: J2.6 TP_RESET.TP U1.P$AC13
SCK: J1.13 U1.P$A12
SCL: IC1.B1 IC2.C1 IC3.12 R4.1 R17.2 TP1.TP U1.P$M2 U3.7
SDA: IC1.C1 IC2.B2 IC3.2 R2.1 R18.2 TP2.TP U1.P$L1 U3.8
SWDCLK: J2.4 TP_SWDCLK.TP U1.P$AA24
SWDIO: J2.2 TP_SWDIO.TP U1.P$AC24
SWO: TP_SWO.TP U1.P$AD22
VBAT: C27.2 C37.2 IC1.C2 TP_VBAT.TP U3.2 U3.3
VBUS: C21.1 C38.2 C42.1 C43.1 D3.5 IC1.A2 J4.A4_B9 J4.A9_B4 U1.P$AD2
VREG: C23.2 C24.2 C39.1 IC1.B2 IC9.A1 IC9.A2 IC9.A3 TP_VREG.TP

## Tracks (layer width: path | path; a pad name or v marks a point on that pad's centre or on a via)
3V3  (via drill 0.35)
  Top 0.15: C34.2 43.3,21.6
  Top 0.3: IC2.C2 43.3,23.02 43.3,21.9 | 43.3,21.9 43.3,21.6 43.1,21.6 41.9,20.4 41.9,19.7 40.1,17.9 | 42.92,31.3 IC3.7 43.19,30.61 44,29.8 44,29 45.5,27.5 45.5,26.5 | 42.92,31.3 42.92,32.16 C19.1 | U1.P$B1 32.96,15.65 32.96,16.2 | C14.1 32.96,16.2 | U1.P$AD14 36.48,8.99 C7.1 | U1.P$AD23 38.98,9.14 C8.1 | U1.P$A22 38.46,16.15 C12.1 39.05,16.84 40.1,17.9 | R8.2 R7.2 29.7,6.17 | 29.7,6.17 R5.2 34.9,7.22 34.9,8 35.85,8.96 C7.1 | C7.1 38.69,8.96 C8.1 | C8.1 39.2,8.9 40.7,7.4 TP_3.3V.TP 42.78,6.22 TP_3V3.TP | J2.1 33.32,30.3 30.4,30.3 29.6,31.1 29.6,33.3 30.3,34 40.22,34 41.46,32.76 | 41.46,32.76 42.92,31.3 | IC3.3 42.42,28.78 44.7,26.5 45.5,26.5 | 23.37,21.7 23.37,21.81 Q1.2 20.54,22.56 19.76,23.34 C33.1 18.07,24.79 C25.1 17.72,24.63 17.72,24.73 16.43,26.02 IC9.E3 IC9.E2 15.69,25.69 14.3,24.3 13.5,24.3 11.32,26.48 R18.1 7.11,26.54 R17.1 | 23.37,21.7 R_PWR_EPD.2 | 43.3,21.9 43.7,21.9 45.5,23.7 45.5,26.5 | 32.96,16.2 32.56,16.6 27.4,16.6 27.2,16.4 | 25.2,21.1 26.3,20 26.3,17.3 27,16.6 27.2,16.6 27.2,16.4 | 25.2,21.1 24.6,21.7 23.37,21.7 | 27.2,16.4 27.2,10.9 | 27.2,10.9 27.78,10.32 C6.1 32.17,10.32 U1.P$W1 33.23,10.88 U1.P$Y2 | 27.2,10.9 27.2,10.2 29.7,7.7 29.7,6.17 | 40.1,17.9 v39.6,18.4 | v27,21.2 25.3,21.2 25.2,21.1 | IC3.10 41.42,32.72 41.46,32.76
  Bottom 0.3: v39.6,18.4 39.57,18.43 29.77,18.43 v27,21.2
ALERT  (via drill 0.35)
  Top 0.15: U1.P$J24 39.97,13.63 v40.1,13.5 | v17.7,31 17.14,31.55 U3.5
  Bottom 0.15: v40.1,13.5 40.7,14.1 40.7,18.5 37,22.2 24.8,22.2 18.2,28.8 18.2,30.6 17.8,31 v17.7,31
D+  (via drill 0.15 pad 0.3)  (1 unrouted)
  Route2 0.15: v32.9,9.4 33.07,9.23 34.08,9.23 U1.P$AD6
  Bottom 0.15: v30.41,17.57 30.41,14.49 31.8,13.1 31.8,10.5 v32.9,9.4
  other vias: 34.48,9.63
D-  (via drill 0.15 pad 0.3)
  Route15 0.15: v26.6,20.5 27.8,20.5 29,19.3 30.14,19.3 D3.6
  Bottom 0.15: U1.P$AD4 33.98,9.72 32.6,11.1 32.6,18.07 29.02,18.07 v26.6,20.5
  other vias: 33.98,9.63 30.41,19.57
DEC1
  Top 0.15: C5.1 32.25,15.86 U1.P$C1
DEC3
  Top 0.15: U1.P$D23 38.98,15.58 39.74,16.34 C11.1
DEC4_6  (via drill 0.35)
  Top 0.15: L3.2 34.6,19.84 | 34.6,19.84 C15.1 C16.1 38.47,19.82 C10.1 | U1.P$B5 34.6,16 34.6,19.84 | U1.P$E24 39.95,15.1 v40.2,15.1 | v39.1,17.7 38.9,17.9 38.9,19.39 C10.1 | C10.1
  Bottom 0.15: v40.2,15.1 39.1,16.2 v39.1,17.7
DN  (via drill 0.35)
  Top 0.15: J4.A7 23.21,28.09 23.5,27.8 23.6,27.8 24.21,28.41 J4.B7 24.21,29.91 v24.3,30 | v28.1,22.7 28.1,19.76 D3.1
  Bottom 0.15: v24.3,30 28.1,26.2 v28.1,22.7
DP  (via drill 0.35)
  Top 0.15: J4.B6 22.71,29.71 23.1,30.1 23.5,30.1 | 23.5,30.1 23.71,29.89 J4.A6 | 23.5,30.1 v23.5,30.8 | v27.4,22.7 27.4,22 27.8,21.6 27.8,21.1 26.7,20 26.7,18.5 27.53,17.67 D3.3
  Bottom 0.15: v23.5,30.8 23.5,29.7 27.4,25.8 v27.4,22.7
EPD_3V3
  Top 0.3: L5.2 17.27,7.43 15.2,7.43 14.87,7.43 14.87,7.41 12.1,7.41 | 12.1,7.41 C1-EP-DR.1 | 11.7,16.26 J1.15 9.86,16.26 9.2,15.6 9.2,6.7 9.7,6.2 10.89,6.2 12.1,7.41 | 11.7,16.26 EPD_C5.2 | EPD_C5.2 | J1.16 11.2,15.76 11.7,16.26 | Q1.3 19.11,20.2 15.7,20.2 12.97,17.47 EPD_C5.2
EPD_BUSY  (via drill 0.15 pad 0.3)
  Route2 0.15: J1.9 24.34,19.26 29.3,14.3 29.3,12.6 31.3,10.6 37.1,10.6 37.4,10.3 37.4,10 37.03,9.63 U1.P$AD12
  other vias: 10.66,19.26 35.98,9.63
EPD_CS  (via drill 0.15 pad 0.3)
  Route15 0.15: J1.12 10.81,17.92 18.08,17.92 18.4,17.6 20.5,17.6 21,18.1 30.7,18.1 31.7,17.1 35.6,17.1 37.4,15.3 37.4,14.5 36.9,14 34.1,14 U1.P$K2
  other vias: 10.66,17.76 33.48,13.38
EPD_DC  (via drill 0.15 pad 0.3)
  Route15 0.15: J1.11 9.34,18.26 9.3,18.3 8,17 8,15.3 12.8,10.5 37.2,10.5 37.3,10.4 37.3,10.2 36.3,9.2 35.91,9.2 U1.P$AD10
  other vias: 10.66,18.26 35.48,9.63
EPD_RST  (via drill 0.15 pad 0.3)
  Route15 0.15: U1.P$AC11 35.33,10.13 35,9.8 35,9.5 34.47,8.97 23.47,8.97 22,7.5 14.6,7.5 7.7,14.4 7.7,17.5 9,18.8 10.62,18.8 J1.10
  other vias: 35.73,10.13 10.66,18.76
GDR  (via drill 0.15 pad 0.3)
  Top 0.15: R2_EP_DR.2 19.91,17.28 Q3.1
  Bottom 0.15: J1.2 10.82,22.6 15.54,22.6 R2_EP_DR.2
  other vias: 10.66,22.76 19.91,18.23
GND  (via drill 0.15 pad 0.3)  (68 unrouted)
  Top 0.15: C18.1 27.68,14.04 C17.1 | U1.P$F23 39.06,14.3 40.73,14.3 C3.2 | X1.2 43.56,15.5 | 43.56,15.5 43.56,14.9 C1.2 | C2.2 42.09,16.91 X1.4 42.18,16.89 43.56,15.5 | EPD_C2.1 EPD_C1.1 13.52,19.76 J1.8 | EPD_C5.1 EPD_C6.1 EPD_C7.1 EPD_C8.1 EPD_C9.1 14.26,11.83 EPD_C10.1 14.26,9.73 EPD_C11.1 13.18,8.61 EPD_C12.1 | C43.2 22.2,25.77 C42.2 | C30.1 v34.3,5.1 34.9,5.1 35.4,4.6 SW_UP.1 | C31.1 v12.2,5 12.9,5 13.4,4.5 SW_ENT.1 | C29.1 v23.2,5 23.9,5 24.4,4.5 SW_DN.1
  other vias: 7.8,2.4 7.3,5 10.7,7.4 12.2,8.6 8.1,10.9 8,24 10.6,19.8 14.4,21.7 14.4,20.5 16.3,15.8 17.7,13.9 19.9,18.8 13.4,3.8 33.3,7.4 30.9,9.4 31.9,8.6 27.7,14.1 30.8,16.1
  pour Route2 (isolate 0.2): 439 corners
HAPTIC_EN  (via drill 0.15 pad 0.3)
  Top 0.15: v41.9,24.3 42.52,24.3 IC2.A1
  Route15 0.15: U1.P$U1 33.19,11.42 33.82,11.42 34.1,11.7 38.1,11.7 39.6,13.2 39.6,17.7 40.4,18.5 40.4,23.3 41.4,24.3 v41.9,24.3
  other vias: 32.98,11.63
IMU_INT1  (via drill 0.15 pad 0.3)
  Top 0.15: v41.2,25 v40.6,24.4 | v31,11.7 32.03,12.63 U1.P$N1
  Bottom 0.15: IC3.5 42.95,26.75 v41.2,25 | v40.6,24.4 42,23 42,7.2 41.7,6.9 34.3,6.9 31,10.2 v31,11.7
  other vias: 42.95,29.59
IMU_INT2  (via drill 0.15 pad 0.3)
  Top 0.15: v35,17.7 v35,19.3 | v36.7,21.6 37.4,22.3 v38,22.3 | v39.2,25.5 40.6,26.9 v41.5,26.9
  Bottom 0.15: v35,17.7 33.88,16.59 33.88,12.79 U1.P$P2 | v35,19.3 35,19.9 v36.7,21.6 | v38,22.3 39.2,23.5 v39.2,25.5 | v41.5,26.9 41.5,28.64 IC3.6
  other vias: 33.48,12.38 42.95,30.09
LX1  (via drill 0.35)
  Top 0.15: L7.1 5.42,28.52 v6.6,29.7 | v16.7,26.9 16.38,27.22 IC9.B3 IC9.B2
  Bottom 0.15: v6.6,29.7 13.9,29.7 v16.7,26.9
LX2  (via drill 0.35)
  Top 0.15: L7.2 5.21,25.79 5.45,25.55 v5.7,25.3 | IC9.D2 IC9.D3 16.98,26.42 v17.8,25.6
  Bottom 0.15: v5.7,25.3 17.5,25.3 v17.8,25.6
MOSI  (via drill 0.15 pad 0.3)
  Route15 0.15: J1.14 10.92,16.5 35.1,16.5 35.97,15.63 U1.P$B13
  other vias: 10.66,16.76 36.23,15.63
N$1
  Top 0.152: 22.98,24.72 R9.2 IC1.D1
N$2
  Top 0.15: R4.2 13.8,26.42 IC9.D1
N$3
  Top 0.15: R2.2 15.12,25.85 IC9.E1
N$4
  Top 0.15: R3.2 40.01,29.07 IC3.1
N$5
  Top 0.15: U1.P$B3 33.73,16.75 L2.1
N$6
  Top 0.15: L2.2 L3.1
N$7
  Top 0.15: U1.P$A23 41.31,18.46 C2.1 43.44,18.46 43.56,18.34 X1.3
N$8
  Top 0.15: U1.P$A18 37.48,16.8 C13.1
N$9
  Top 0.15: U1.P$B24 40.41,15.63 | 40.41,15.63 X1.1 | C1.1 41.4,14.64 40.41,15.63
N$10
  Top 0.15: U1.P$H23 39.1,14 40.67,14 C3.1 41.45,13.87 L1.1
N$11
  Top 0.15: L1.2 41.76,12.59 C4.1 C22.1 44.2,11.9 ANT1.1
N$12
  Top 0.15: U1.P$N24 C9.1
N$13
  Top 0.15: U1.P$AC5 34.1,10 32.37,10 C20.1
N$14
  Top 0.15: Q3.3 19.17,15.09 19.17,13.4 | L5.1 17.87,13.4 19.17,13.4 | 20.89,13.4 20.9,13.41 20.9,15.41 C2-EP-DR.2 | 20.89,13.4 19.17,13.4 | D5.2 20.89,10.96 20.89,13.4
N$15
  Top 0.15: 24.13,15.91 23.1,15.91 C2-EP-DR.1 | D4.1 22.11,13.8 24.13,15.82 24.13,15.91 | 24.13,15.91 24.13,16.6 22.33,18.4 D2.2
N$16
  Top 0.15: SJ1.2 16.89,17.9 17.4,17.9 | R_TYPE_SEL.2 17.71,17.9 17.4,17.9 | R1_EP_DR.1 18.27,18.77 17.4,17.9
N$17
  Top 0.15: J1.4 12.91,21.76 EPD_C2.2
N$18
  Top 0.15: J1.24 10.66,8.67 EPD_C12.2
N$19
  Top 0.15: IC2.A2 43.28,25.7 C32.2
N$20
  Top 0.15: J1.22 11.24,12.76 11.9,12.1 11.9,11.1 12.19,10.81 EPD_C10.2
N$22
  Top 0.15: J1.20 12.14,13.76 EPD_C8.2
N$23
  Top 0.15: J1.19 12.75,14.26 EPD_C7.2
N$24
  Top 0.15: J1.18 12.56,14.76 EPD_C6.2
N$26
  Top 0.15: J1.5 12.22,21.26 EPD_C1.2
N$29
  Top 0.152: J4.A5 24.71,28.28 R1_USB.2
N$30
  Top 0.152: 21.67,28.93 J4.B5 21.71,28.02 R2_USB.1
OUT+  (via drill 0.15 pad 0.3)
  Top 0.15: v42.4,21.6 42.22,21.42 TP_OP.TP
  Bottom 0.15: IC2.A3 43.78,23.54 42.4,22.16 v42.4,21.6
  other vias: 43.78,24.04
OUT-  (via drill 0.15 pad 0.3)
  Top 0.15: v44.7,20.7 44.7,19.46 TP_ON.TP
  Bottom 0.15: IC2.C3 44.7,22.12 v44.7,20.7
  other vias: 43.78,23.04
P0.00/XL1
  Top 0.15: U1.P$D2 33.4,14.8 30.53,14.8 X2.1 28.25,14.08 C17.2
P0.01/XL2
  Top 0.15: U1.P$F2 33.36,14.5 32.5,14.5 32.1,14.1 32.1,13.2 31.2,12.3 30.53,12.3 X2.2 28.29,11.58 C18.2
P0.13  (via drill 0.15 pad 0.3)
  Top 0.15: SW_UP.2 32.59,4.5 33.2,5.1 C30.2 R5.1 34.02,5.8 v35.1,5.8 | U1.P$AD8 35.03,9.58 35.03,8.79 v34.53,8.29
  Route2 0.15: v35.1,5.8 35.1,7.71 v34.53,8.29
P0.14  (via drill 0.15 pad 0.3)
  Top 0.15: SW_ENT.2 10.9,4.11 10.9,4.7 11.2,5 C31.2 11.73,5.05 R8.1 | U1.P$AC9 v34.73,10.13
  Route2 0.15: R8.1 21.62,5.62 26.13,10.13 v34.73,10.13
  other vias: 11.73,5.62
P1.01  (via drill 0.15 pad 0.3, 0.35)
  Top 0.15: Q1.1 22.68,20.71 R_PWR_EPD.1 24.09,20.71 v25.3,19.5 | v39,10.2 38.98,10.22 U1.P$Y23
  Bottom 0.15: v25.3,19.5 25.3,18.8 31.4,12.7 31.4,10.3 34,7.7 37.4,7.7 39,9.3 v39,10.2
P1.02  (via drill 0.15 pad 0.3)
  Top 0.15: SW_DN.2 21.6,4.4 22.2,5 C29.2 | C29.2 | R7.1 22.8,5.51 C29.2
  Route2 0.15: R7.1 30.09,5.62 33.13,8.67 36.53,8.67 38.59,10.73 39.08,10.73 U1.P$W24
  other vias: 22.69,5.62 39.48,11.13
PMIC_INT  (via drill 0.15 pad 0.3, 0.35)
  Top 0.15: IC1.A1 24.28,25.92 v24,26.2 | v25.1,22.7 26.07,21.73 v26.15,21.73 | U1.P$T2 v33.4,11.8
  Route2 0.15: v30.3,12.7 32.5,12.7 v33.4,11.8
  Bottom 0.15: v24,26.2 24.5,26.2 25.1,25.6 v25.1,22.7 | v26.15,21.73 24.8,20.38 24.8,16.3 28.4,12.7 v30.3,12.7
PREVGH  (via drill 0.15 pad 0.3)
  Top 0.15: J1.21 11.53,13.26 EPD_C9.2 | v22.6,11.7 23.65,11.7 D5.1
  Bottom 0.15: EPD_C9.2 22.44,11.86 v22.6,11.7
  other vias: 12.93,11.86
PREVGL  (via drill 0.15 pad 0.3)
  Top 0.15: J1.23 10.72,12.2 11.4,12.2 11.6,12 11.6,10.9 12.79,9.71 EPD_C11.2
  Bottom 0.15: EPD_C11.2 21.42,9.71 D4.2
  other vias: 12.98,9.71 25.51,13.8
RESE  (via drill 0.15 pad 0.3)
  Top 0.15: R1_EP_DR.2 18.55,17.84 Q3.2
  Bottom 0.15: J1.3 14.89,22.26 R1_EP_DR.2
  other vias: 10.66,22.26 18.93,18.23
RESET  (via drill 0.15 pad 0.3, 0.35)
  Top 0.15: J2.6 35.26,28.08 39.35,24 40.9,24 41.4,23.5 41.4,23 41,22.6 40.3,22.6 40,22.9 35.7,22.9 TP_RESET.TP 34.97,20.97 37.53,20.97 v38,20.5 | v37.8,19.1 v36.2,17.5
  Bottom 0.15: v38,20.5 38,19.3 v37.8,19.1 | U1.P$AC13 38.03,10.13 39,11.1 39,15.8 37.3,17.5 v36.2,17.5
  other vias: 36.23,10.13
SCK  (via drill 0.15 pad 0.3)
  Route15 0.15: J1.13 10.76,17.16 31.14,17.16 31.5,16.8 35.31,16.8 U1.P$A12
  other vias: 10.66,17.26 35.98,16.13
SCL  (via drill 0.15 pad 0.3, 0.35)  (1 unrouted)
  Top 0.15: R4.1 12.71,26.9 10.9,26.9 8.62,29.18 R17.2 9.56,31.62 TP1.TP 9.74,33.8 v12.2,33.8 | U3.7 17.64,33.26 v17.9,33 | v23.2,26.1 23.78,25.52 v24.44,25.52
  Route2 0.15: U1.P$M2 34,13.4 34,16.14 36.62,18.77 v36.62,18.87 37.76,20 40.7,20 41.3,20.6 41.3,22 42.34,23.04 IC2.C1
  Route15 0.15: v24.44,25.52 26.2,23.76 26.2,22.7 28.4,20.5 36.3,20.5 36.62,20.18 v36.62,18.87
  Bottom 0.15: v17.9,33 17.6,33 | 17.6,33 13,33 v12.2,33.8 | 17.6,33 19.9,30.7 21.8,30.7 23.2,29.3 v23.2,26.1 | IC3.12 40.7,28.89 40.7,24.9 42.56,23.04 IC2.C1
  other vias: 41.4,29.59 42.78,23.04 33.48,12.88
SDA  (via drill 0.15, 0.15 pad 0.3, 0.35)
  Top 0.15: R18.2 10.57,25.93 v10.6,25.9 | v12.4,26.4 12.95,25.85 R2.1 | U3.8 17.84,33.76 18.42,33.19 18.42,30.82 17.7,30.1 v17.7,30 | v18.6,22.7 17.68,21.78 TP2.TP | IC1.C1 21.92,25.12 v21.5,24.7 21.9,24.3 v22.1,24.3 | IC3.2 41.92,26.28 v42.6,25.6
  Route2 0.15: v22.1,24.3 32.98,13.42 U1.P$L1 32.98,13.43 33.7,14.15 33.7,19.6 35.2,21.1 39.8,21.1 42.3,23.6 42.3,25.3 v42.6,25.6
  Bottom 0.15: v10.6,25.9 11.1,26.4 12.3,26.4 | 12.3,26.4 v12.4,26.4 | v17.7,30 17.7,26.7 17.5,26.5 | 17.5,26.5 17.3,26.3 12.4,26.3 12.3,26.4 | 17.5,26.5 17.9,26.1 18.7,26.1 19.7,25.1 19.7,23.8 | 19.7,23.8 v18.6,22.7 | v21.5,24.7 20.6,23.8 19.7,23.8 | v42.6,25.6 42.6,24.22 IC2.B2
  other vias: 43.28,23.54 32.98,13.13
SWDCLK  (via drill 0.15 pad 0.3)
  Top 0.15: U1.P$AA24 39.92,11.07 40.8,11.07 | 40.8,11.07 TP_SWDCLK.TP | J2.4 34.3,28.74 34.3,24.4 35,23.7 40.2,23.7 v40.8,23.1 | v40.3,11.7 40.8,11.2 40.8,11.07
  Route15 0.15: v40.3,11.7 40.3,12.9 40.8,13.4 v40.8,23.1
SWDIO  (via drill 0.35)
  Top 0.15: TP_SWDIO.TP 39.03,7.5 v39.5,7.5 | v40.4,9.8 39.81,9.8 U1.P$AC24 | J2.2 35.78,30.62 36.01,30.39 39.51,30.39 v39.6,30.3
  Bottom 0.15: v39.5,7.5 39.5,8.9 v40.4,9.8 41.3,10.7 41.3,18.6 39.6,20.3 v39.6,30.3
SWO  (via drill 0.15 pad 0.3)
  Route2 0.15: TP_SWO.TP 39.39,8.72 U1.P$AD22
  other vias: 41.58,8.72 38.48,9.63
VBAT
  Top 0.15: IC1.C2 25.68,25.12 26,24.8 | C27.2 14.2,33.2 14.3,33.2
  Top 0.3: 26,24.8 26.25,24.55 | 26.25,24.55 26.52,24.27 C37.2 | U3.2 15.12,33.2 14.3,33.2 | U3.3 14.64,32.76 14.45,32.95 | 14.45,32.95 14.2,33.2 | TP_VBAT.TP 13.3,32.07 13.57,32.07 13.75,32.25 | 13.75,32.25 14.45,32.95 | 13.75,32.25 16.6,29.4 17.8,29.4 18.2,29 18.2,27.1 19.35,25.95 21.5,23.8 25.3,23.8 26.05,24.55 26.25,24.55
VBUS  (via drill 0.15, 0.35)
  Top 0.15: 24.97,26.8 24.94,26.77 IC1.A2 | C42.1 22.16,26.77
  Top 0.3: C38.2 24.97,26.8 25.59,27.41 | J4.A4_B9 25.86,27.69 25.59,27.41 | U1.P$AD2 33.48,8.82 | 33.48,8.82 33.48,8.56 C21.1 | J4.A9_B4 21.06,27.15 C43.1 22.16,26.77 24.94,26.77 | 25.59,27.41 27.68,27.41 28.9,26.2 28.9,22.2 29.7,21.4 31.7,21.4 32.5,20.6 32.5,19.9 31.5,18.9 | D3.5 31.22,18.62 31.5,18.9 | 33.48,8.82 v34.1,8.2 | v31.9,17.6 31.5,18 31.5,18.9
  Bottom 0.3: v34.1,8.2 34.1,8.9 32.2,10.8 32.2,17.3 v31.9,17.6
VREG
  Top 0.3: IC1.B2 C39.1 26.85,24.95 27.7,24.1 27.7,23.7 27.3,23.3 27.1,23.3 21.1,23.3 16.78,27.62 IC9.A3 IC9.A2 IC9.A1 13.56,27.62 C23.2 C24.2 12.36,27.62 TP_VREG.TP